# EAGLE board BusPirate-v3a-final (EAGLE 5.06)
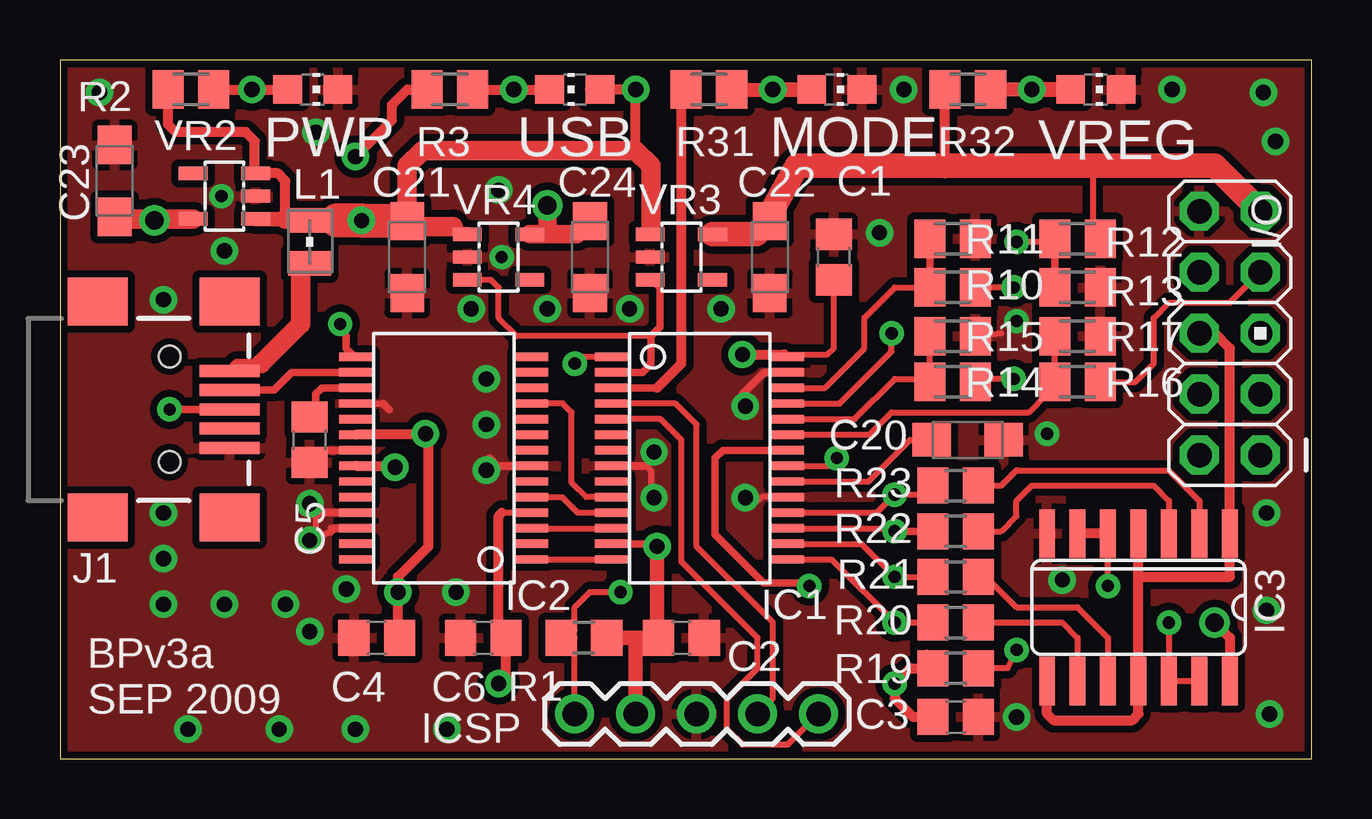
[diagram p0: board, top side]
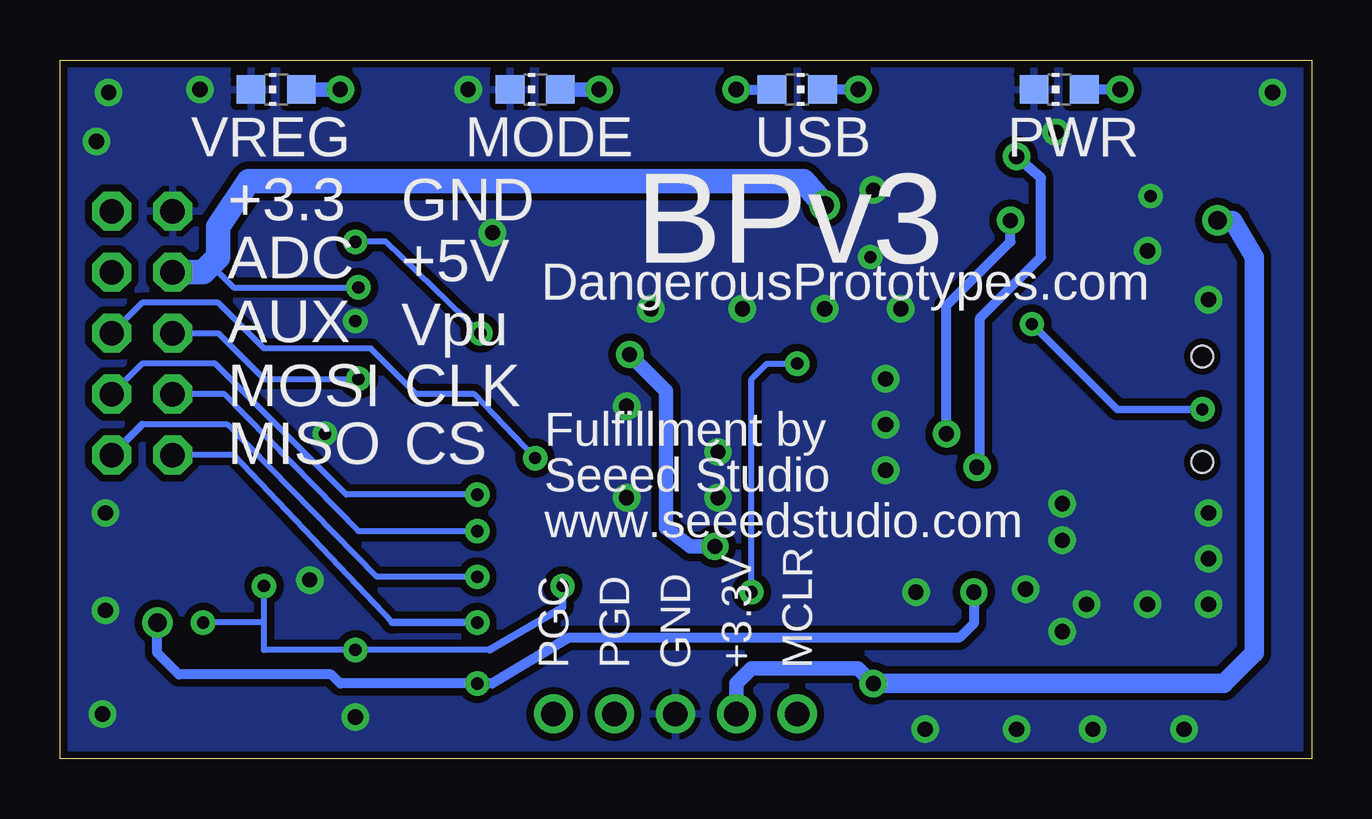
[diagram p1: board, bottom side, seen from below]

Size 52.19 x 29.13 mm. Coordinates in mm from the lower left corner, seen from the top.
Outline: 52.19,0 52.19,29.13 0,29.13 0,0 52.19,0
Copper layers (1*16): Top 0.035mm / dielectric 1.5mm / Bottom 0.035mm
Design rules "SparkFun": minimum track width 8mil, minimum drill 20mil, track to track 8mil, track to pad 8mil, pad to pad 8mil, via to via 8mil, smd to smd 8mil, copper to edge 10mil, drill to drill 8mil, minimum pad ring 12mil, minimum via ring 10mil, stop-mask expansion 4mil, vias tented up to drill 25mil, thermal gap 10mil
tRestrict: area 11.9,9.9 to 12.8,10

## Footprints (pad centres in the part's own frame; a part is rotated, then mirrored left to right if it is on the bottom)
C0805 = smd 1.3 x 1.5: 1 -0.95,0; 2 0.95,0
SMC_A = smd 1.6 x 1.4: + -1.5,0; - 1.5,0
AVR_ICSP = drill 1.016 octagon: 1 -1.27,5.08; 2 1.27,5.08; 3 -1.27,2.54; 4 1.27,2.54; 5 -1.27,0; 6 1.27,0; 7 -1.27,-2.54; 8 1.27,-2.54; 9 -1.27,-5.08; 10 1.27,-5.08
SSOP28DB = smd 0.348 x 1.397: 1 -4.225,-3.656; 2 -3.575,-3.656; 3 -2.925,-3.656; 4 -2.275,-3.656; 5 -1.625,-3.656; 6 -0.975,-3.656; 7 -0.325,-3.656; 8 0.325,-3.656; 9 0.975,-3.656; 10 1.625,-3.656; 11 2.275,-3.656; 12 2.925,-3.656; 13 3.575,-3.656; 14 4.225,-3.656; 15 4.225,3.656; 16 3.575,3.656; 17 2.925,3.656; 18 2.275,3.656; 19 1.625,3.656; 20 0.975,3.656; 21 0.325,3.656; 22 -0.325,3.656; 23 -0.975,3.656; 24 -1.625,3.656; 25 -2.275,3.656; 26 -2.925,3.656; 27 -3.575,3.656; 28 -4.225,3.656
SO14 = smd 0.66 x 2.032: 1 -3.81,-3.073; 2 -2.54,-3.073; 3 -1.27,-3.073; 4 0,-3.073; 5 1.27,-3.073; 6 2.54,-3.073; 7 3.81,-3.073; 8 3.81,3.073; 9 2.54,3.073; 10 1.27,3.073; 11 0,3.073; 12 -1.27,3.073; 13 -2.54,3.073; 14 -3.81,3.073
1X05 = drill 1.016 round: 1 0,0; 2 2.54,0; 3 5.08,0; 4 7.62,0; 5 10.16,0
USB-MINIB = smd 2.5 x 0.5: D+ 2.5,0; D- 2.5,0.8; GND 2.5,-1.6; ID 2.5,-0.8; VBUS 2.5,1.6 | smd 2.5 x 2: GND@1 -3,-4.5; GND@2 -3,4.5; GND@3 2.5,4.5; GND@4 2.5,-4.5 | hole 0.9: 0,2.2; 0,-2.2
WE-KI_0805_B = smd 1.02 x 1.78: 1 -0.89,0; 2 0.89,0
CHIP-LED0805 = smd 1.2 x 1.2: A 0,-1.05; C 0,1.05
R0805 = smd 1.3 x 1.5: 1 -0.95,0; 2 0.95,0
M0805 = smd 1.3 x 1.6: 1 -0.95,0; 2 0.95,0
SOT23-5 = smd 0.55 x 1.2: 1 -0.95,-1.3; 2 0,-1.3; 3 0.95,-1.3; 4 0.95,1.3; 5 -0.95,1.3

## Placement (x,y rotation side)
C1  0.1uF  [C0805]  32.25,20.92 90 top
C2  0.1uF  [C0805]  25.9,5.04 0 top
C3  0.1uf  [C0805]  37.33,1.74 0 top
C4  0.1uF  [C0805]  13.2,5.04 180 top
C5  0.1uF  [C0805]  10.41,13.3 270 top
C6  0.1uF  [C0805]  17.65,5.04 180 top
C20  10uF  [SMC_A]  37.84,13.3 0 top
C21  10uF  [SMC_A]  14.47,20.92 270 top
C22  2.2uF  [SMC_A]  29.59,20.92 270 top
C23  2.2uF  [SMC_A]  2.28,24.09 90 top
C24  2.2uF  [SMC_A]  22.09,20.92 270 top
I/O  M05X2PTH  [AVR_ICSP]  48.76,17.74 180 top
IC1  PIC24FJ64GA002-I/SSSS-ALTERNATE  [SSOP28DB]  26.66,12.54 270 top
IC2  FT232RLSSOP  [SSOP28DB]  16,12.54 90 top
IC3  4066D  [SO14]  44.95,6.31 180 top
ICSP  M05X1PTH  [1X05]  21.46,1.87 0 top
J1  USBSMD  [USB-MINIB]  4.57,14.57 0 top
L1  700mA+ ferrite bead  [WE-KI_0805_B]  10.41,21.55 270 top
LED1  [CHIP-LED0805]  10.54,27.9 270 top
LED1A  [CHIP-LED0805]  10.54,27.9 90 bottom
LED2  [CHIP-LED0805]  32.38,27.9 270 top
LED2A  [CHIP-LED0805]  32.38,27.9 90 bottom
LED3  [CHIP-LED0805]  43.17,27.9 270 top
LED3A  [CHIP-LED0805]  43.17,27.9 90 bottom
LED4  [CHIP-LED0805]  21.46,27.9 90 top
LED4A  [CHIP-LED0805]  21.46,27.9 270 bottom
R1  2K  [R0805]  21.84,5.04 0 top
R2  1K1  [M0805]  5.46,27.9 180 top
R3  1K1  [M0805]  16.25,27.9 180 top
R10  10K  [M0805]  37.21,19.65 180 top
R11  10K  [M0805]  37.21,21.68 180 top
R12  10K  [M0805]  42.41,21.68 180 top
R13  10K  [M0805]  42.41,19.65 180 top
R14  10K  [M0805]  37.21,15.71 180 top
R15  10K  [M0805]  37.21,17.61 180 top
R16  10K  [M0805]  42.41,15.71 180 top
R17  10K  [M0805]  42.41,17.61 180 top
R19  10K  [R0805]  37.33,3.77 0 top
R20  10K  [R0805]  37.33,5.68 0 top
R21  10K  [R0805]  37.33,7.58 0 top
R22  10K  [R0805]  37.33,9.49 0 top
R23  2K  [R0805]  37.33,11.39 0 top
R31  390R  [M0805]  27.05,27.9 180 top
R32  390R  [M0805]  37.84,27.9 180 top
VR2  MIC5205-3.3YM5  [SOT23-5]  6.85,23.46 90 top
VR3  MIC5205-3.3YM5  [SOT23-5]  25.9,20.92 270 top
VR4  MIC5205-5.0YM5  [SOT23-5]  18.28,20.92 270 top

## Library data of the parts
C1-C6 C20-C24 R1 R2 R19-R23 R31 R32 = rcl
I/O IC2 ICSP J1 VR2-VR4 = SparkFun
IC1 = microchip-pic24
IC3 = 40xx
L1 = wuerth-elektronik
LED1 LED1A LED2 LED2A LED3 LED3A LED4 LED4A = led
R3 R10-R17 = resistor

## Nets
$N26: J1.VBUS L1.2
ADC: I/O.7 R16.1
ADC1: IC1.23 R16.2 R17.2
ADC2: IC1.24 R14.2 R15.2
ADC3: IC1.25 R12.2 R13.2
ADC4: IC1.26 R10.2 R11.2
AUX1: I/O.5 IC1.21
CLK: I/O.4 IC1.17 R22.1
CS: I/O.2 IC1.15 R20.1
CTS: IC1.10 IC2.11
GND: C1.2 C2.2 C3.2 C4.2 C5.2 C6.2 C20.- C21.- C22.- C23.- C24.- I/O.10 IC1.8 IC1.19 IC1.27 IC2.7 IC2.18 IC2.21 IC2.25 IC2.26 IC3.7 ICSP.3 J1.GND LED1.C LED1A.C LED2.C LED2A.C LED3.C LED3A.C R11.1 R13.1 R15.1 R17.1 VR2.2 VR3.2 VR4.2
LD1: IC1.3 R31.2
MCLR: IC1.1 ICSP.1 R1.1
MISO: I/O.1 IC1.16 R21.1
MOSI: I/O.3 IC1.18 R23.1
N$1: IC3.2 R23.2
N$2: IC3.3 R22.2
N$3: C20.+ IC1.20
N$4: IC3.10 R21.2
N$5: IC3.9 R20.2
N$6: LED2.A LED2A.A R31.1
N$7: LED1.A LED1A.A R2.1
N$8: VR2.4
N$9: C5.1 IC2.17
N$11: IC2.22 R3.2
N$13: LED4.C LED4A.C R3.1
N$15: IC2.15 J1.D+
N$16: IC2.16 J1.D-
N$18: LED3.A LED3A.A R32.1
PGC: IC1.5 ICSP.5
PGD: IC1.4 ICSP.4
PULLUPEN: IC1.22 IC3.5 IC3.6 IC3.12 IC3.13 R19.2
RTS: IC1.12 IC2.3
RX: IC1.11 IC2.5
SWV33: C22.+ I/O.9 R12.1 R32.2 VR3.5
SWV50: C24.+ I/O.8 R10.1 VR4.5
TP0: IC1.9
TP1: IC1.7
TP2: IC1.6
TX: IC1.14 IC2.1
V+: C3.1 C4.1 C21.+ IC2.20 IC3.14 L1.1 LED4.A LED4A.A R2.2 R19.1 VR2.1 VR2.3 VR3.1 VR4.1
VCC: C1.1 C2.1 C6.1 C23.+ IC1.13 IC1.28 IC2.4 ICSP.2 R1.2 VR2.5
VEXTERN: I/O.6 IC3.1 IC3.4 IC3.8 IC3.11 R14.1
VREGEN: IC1.2 VR3.3 VR4.3

## Tracks (layer width: path | path; a pad name or v marks a point on that pad's centre or on a via)
$N26
  Top 0.406: 8.38,16.47 7.37,16.47 J1.VBUS
  Top 0.813: L1.2 10.03,20.41 10.03,18.12 8.38,16.47
ADC
  Top 0.254: I/O.7 48.76,19.01 46.22,19.01 45.59,18.38 45.59,16.47 44.83,15.71 R16.1
ADC1
  Top 0.254: R17.2 R16.2 41.46,15.2 41.14,15.2 40.38,14.44 34.67,14.44 33.74,13.51 IC1.23
ADC2
  Top 0.254: R15.2 R14.2 36.26,15.84 34.79,15.84 33.12,14.16 IC1.24
ADC3  (via drill 0.51)
  Top 0.254: v34.67,17.74 34.67,16.98 32.5,14.81 IC1.25 | v39.87,21.55 41.34,21.55 R12.2
  Top 0.305: R13.2 R12.2 41.46,21.87
  Bottom 0.254: v39.87,21.55 38.6,21.55 v34.67,17.74
ADC4
  Top 0.254: IC1.26 31.88,15.46 33.52,17.11 33.52,18.38 34.79,19.65 R10.2
  Top 0.305: R10.2 R11.2
  Top 0.406: R10.2 36.06,19.65
AUX1  (via drill 0.51)
  Top 0.254: IC1.21 32.05,12.21 v32.38,12.54
  Bottom 0.254: I/O.5 48.76,19.01 45.59,19.01 43.68,17.11 39.24,17.11 37.33,15.2 34.92,15.2 v32.38,12.54
CLK  (via drill 0.51)
  Top 0.254: IC1.17 34.67,9.61 v34.79,9.49
  Top 0.305: v34.79,9.49 R22.1
  Bottom 0.254: I/O.4 45.33,15.2 39.75,9.49 v34.79,9.49
CS  (via drill 0.51)
  Top 0.254: R20.1 v34.79,5.68 32.25,8.22 | 32.25,8.22 32.22,8.25 | IC1.15 32.16,8.31 32.25,8.22
  Bottom 0.254: I/O.2 44.95,12.66 38.35,5.68
  Bottom 0.305: v34.79,5.68 38.35,5.68
CTS
  Top 0.254: IC1.10 21.94,10.91 21.33,11.52 21.33,14.44 20.95,14.82 19.66,14.82 IC2.11
GND  (via drill 0.51, 0.64)
  Top 0.254: IC2.18 13.47,14.81 | R15.1 39.24,17.74 | 24.45,12.21 24.63,12.03 24.63,11.01 v24.76,10.88 | IC1.19 29.23,10.91 29.08,10.76 | 10.66,10.12 10.66,9.49 | v10.41,9.11 11.3,9.49
  Top 0.305: IC2.7 18.23,12.21 17.9,12.54 | 13.47,14.81 13.71,14.57 | IC1.27 29.35,16.11 28.44,15.2 28.44,14.82 v28.57,14.69 | IC1.8 24.45,12.21 | IC2.21 10.53,12.86 C5.2 | IC2.25 10.8,10.26 10.66,10.12 | IC2.26 11.3,9.61 11.3,9.49
  other vias: 41.78,7.45 50.29,6.18 50.41,1.87 41.14,13.55 39.87,18.25 34.16,21.93 4.31,10.25 4.31,19.14 35.17,27.9 28.57,10.88 39.87,1.74 50.29,10.25 50.67,25.74 23.74,18.76 20.32,18.76 18.28,23.71 17.14,18.76 17.77,15.84 4.31,6.44 12.31,1.23 4.31,8.34 10.41,10.63 24.76,12.79 10.66,26.12 27.55,18.76 18.41,20.92 5.33,1.23 50.16,27.78 46.35,27.9 9.39,6.44 17.77,12.03 17.77,13.93 6.85,6.44 1.65,27.78 16.5,6.95 10.41,5.3 9.14,1.23 16.12,1.23 11.93,7.07 6.73,23.46 6.85,21.17
  pour Top (isolate 0.305): 0.5,29.17 51.94,29.17 51.94,-0.04 0.5,-0.04
  pour Bottom (isolate 0.305): 0.5,29.17 51.94,29.17 51.94,-0.04 0.5,-0.04
LD1
  Top 0.305: IC1.3 24.89,15.46
  Top 0.406: 24.89,15.46 25.9,16.47 25.9,27.58 R31.2
MCLR  (via drill 0.51)
  Top 0.254: IC1.1 21.75,16.76 v21.46,16.47 | v23.36,6.95 22.09,6.95 21.46,6.31 21.46,5.36 R1.1 21.46,5.04 ICSP.1
  Bottom 0.254: v21.46,16.47 22.73,16.47 23.36,15.84 v23.36,6.95
MISO  (via drill 0.51)
  Top 0.254: v34.79,7.58 R21.1 | v34.79,7.58 34.69,7.69 | IC1.16 33.41,8.96 v34.79,7.58
  Bottom 0.254: 48.76,13.93 45.21,13.93 38.98,7.58 v34.79,7.58
  Bottom 0.305: 48.76,13.93 I/O.1
MOSI  (via drill 0.51)
  Top 0.254: IC1.18 34.04,10.26 v34.79,11.01 36,11.01 R23.1
  Bottom 0.254: I/O.3 48.76,16.47 45.72,16.47 40.25,11.01 v34.79,11.01
N$1
  Top 0.254: IC3.2 47.49,10.76 46.22,12.03 39.87,12.03 39.24,11.39 R23.2
N$2
  Top 0.254: R22.2 39.24,9.49 39.87,10.12 39.87,10.76 40.51,11.39 45.59,11.39 46.22,10.76 IC3.3
N$3
  Top 0.254: IC1.20 33.69,11.56 35.43,13.3 C20.+
N$4
  Top 0.254: R21.2 38.6,7.58 39.87,6.31 42.41,6.31 43.68,5.04 IC3.10
N$5
  Top 0.254: R20.2 41.78,5.68 42.41,5.04 IC3.9
N$6  (via drill 0.64)
  Top 0.406: R31.1 28.16,27.87
  Top 0.61: 28.16,27.87 LED2A.A v29.71,27.9
  Bottom 0.61: v29.71,27.9 LED2A.A
N$7  (via drill 0.64)
  Top 0.406: 6.22,27.9 R2.1 v8,27.9 LED1A.A
  Bottom 0.406: v8,27.9 LED1A.A
N$9
  Top 0.305: IC2.17 10.92,15.46 10.66,15.2 10.66,14.5 C5.1
N$11  (via drill 0.64)
  Top 0.406: 15.36,27.78 R3.2 14.47,27.9 13.84,27.27 13.84,26.63 v12.31,25.11 | IC2.22 13.91,12.21 v13.96,12.15
  Bottom 0.406: v12.31,25.11 11.3,24.22 11.3,20.92 13.84,18.38 13.84,12.15 v13.96,12.15
N$13  (via drill 0.64)
  Top 0.406: R3.1 v18.92,27.9 | v18.92,27.9 LED4A.C v18.92,27.9
  Bottom 0.406: v18.92,27.9 LED4A.C
N$15  (via drill 0.51)
  Top 0.305: v4.57,14.57 J1.D+ | IC2.15 12.28,16.76 11.93,17.11 11.93,17.61 v11.68,18.12
  Bottom 0.305: v4.57,14.57 8.12,14.57 v11.68,18.12
N$16
  Top 0.254: IC2.16 12.36,16.09
  Top 0.305: J1.D- 8.92,15.37 9.67,16.11 IC2.16
N$18  (via drill 0.64)
  Top 0.406: 42.1,27.93 LED3A.A
  Top 0.61: R32.1 42.1,27.93 | LED3A.A v40.51,27.9
  Bottom 0.61: v40.51,27.9 LED3A.A
PGC
  Top 0.254: IC1.5 25.04,14.16 25.9,13.3 25.9,8.22 29.08,5.04 29.08,3.77 27.81,2.5 27.81,1.23 28.44,0.6 30.35,0.6 ICSP.5
PGD
  Top 0.254: IC1.4 25.66,14.81 26.54,13.93 26.54,8.85 29.71,5.68 29.71,2.5 ICSP.4
PULLUPEN  (via drill 0.51)
  Top 0.254: v46.22,5.68 IC3.12 IC3.13 | v43.68,7.2 IC3.5 | R19.2 39.49,3.77 v39.87,4.53
  Top 0.305: IC1.22 27.62,12.86 27.3,12.54 27.3,9.36 29.33,7.33 31.11,7.33 v31.24,7.2
  Top 0.406: IC3.5 IC3.6
  Bottom 0.254: 43.68,5.68 43.68,4.53 v39.87,4.53 34.28,4.53 | 43.68,5.68 v43.68,7.2 | 43.68,5.68 v46.22,5.68
  Bottom 0.305: v31.24,7.2 31.24,6.31 34.28,4.53
RTS
  Top 0.254: IC2.3 IC1.12
RX
  Top 0.254: IC1.11 21.57,10.26 20.92,10.91 IC2.5
SWV33
  Top 0.254: R12.1 43.05,21.55 43.05,24.73
  Top 0.406: 37.02,27.9 R32.2 36.89,24.41 36.7,24.73
  Top 0.61: C22.+ 29.59,22.69
  Top 1.016: VR3.5 29.04,21.87 C22.+ | 29.59,22.69 30.73,24.73 36.7,24.73 43.05,24.73 48.13,24.73 I/O.9
SWV50  (via drill 0.51, 0.76)
  Top 0.254: v39.75,19.65 R10.1 | C24.+ 22.09,22.19
  Top 0.61: 21.54,21.87 C24.+ | 20.19,21.87 20.32,21.99
  Top 0.762: VR4.5 20.19,21.87 21.54,21.87 | 20.32,21.99 v20.32,23.08
  Bottom 0.254: v39.75,19.65 44.95,19.65 45.91,20.6
  Bottom 1.016: v20.32,23.08 21.2,24.09 44.32,24.09 45.59,22.19 45.59,20.92 45.91,20.6 46.22,20.28 I/O.8
TX
  Top 0.254: IC2.1 IC1.14
V+  (via drill 0.51, 0.64, 0.76)
  Top 0.254: IC3.14 48.76,2.82 | 36.13,4.34 R19.1 36.38,3.45
  Top 0.406: C4.1 14.09,5.74 14.09,7.58 | 36.13,4.34 36.13,3.84 36.06,3.77 35.43,3.77 v34.79,3.14 34.79,2.5 35.55,1.74 C3.1 | 14.09,7.58 v14.09,6.95 | 14.09,7.58 15.36,8.85 15.36,13.42 v15.23,13.55 | IC3.14 48.76,5.04 v48.13,5.68 | 22.09,27.9 LED4A.A v24,27.9 24,25.36 | 9.39,22.51 9.39,24.09 9.08,24.41 VR2.3 8.12,24.44 8.12,25.74 7.74,26.12 4.82,26.12 4.51,26.44 R2.2 | v15.23,13.55 15.11,13.55 | IC2.20 15.19,13.51 v15.23,13.55
  Top 0.61: 9.39,22.51 VR2.1 | VR4.1 16.7,21.87 16.38,22.19 | VR3.1 24.6,22.16 24.63,22.19
  Top 0.813: 14.47,22.44 14.47,24.73 15.11,25.36 24,25.36 24.63,24.73 24.63,22.19 | 16.38,22.19 14.7,22.19 C21.+ | 9.39,22.51 10.34,22.51 L1.1
  Top 1.016: 14.47,22.44 C21.+ | v12.57,22.44 | L1.1 11.55,22.44
  Top 1.422: 14.47,22.44 v12.57,22.44 11.55,22.44
  Bottom 0.406: v48.13,5.68 48.13,4.41 47.24,3.52 40.89,3.52 40.51,3.14 v34.79,3.14 34.16,3.14 30.98,5.04 14.7,5.04 14.1,5.64 v14.1,6.94 v14.09,6.95 | v24,27.9 LED4A.A | v15.23,13.55 15.23,18.89 12.57,21.55 v12.57,22.44
VCC  (via drill 0.64, 0.76)
  Top 0.254: R1.2 23.36,4.72 | 30.2,16.85 32,16.85 32.25,17.11 C1.1 | 18.42,10.26 IC2.4 | C6.1 18.28,5.36
  Top 0.305: IC1.13 24.78,8.96 v24.89,8.85 | 30.2,16.85 30.23,16.85 IC1.28
  Top 0.406: 25.27,5.36 C2.1 24.89,5.36 | v24.89,8.85 24.52,8.96 | v28.44,16.85 30.2,16.85 | 18.42,10.26 18.28,10.12 18.28,5.36 | C6.1 18.6,3.45 v18.28,3.14
  Top 0.61: 24,5.04 R1.2 | 24,5.04 C2.1 | 24.89,5.36 v24.89,8.85 | ICSP.2 24,5.04
  Top 0.813: C23.+ 2.49,22.51 VR2.5 4.25,22.51 v3.93,22.44
  Bottom 0.61: ICSP.2 24,3.14 23.36,3.77 18.92,3.77 v18.28,3.14 | v24.89,8.85 25.9,8.85 26.92,9.61 26.92,15.33 v28.44,16.85
  Bottom 0.813: v3.93,22.44 3.3,22.44 2.41,20.92 2.41,4.41 3.68,3.14 v18.28,3.14
VEXTERN  (via drill 0.51)
  Top 0.254: v39.75,15.84 38.28,15.84 R14.1
  Top 0.406: 44.95,7.58 48.76,7.58 IC3.1 48.76,17.11 48.13,17.74 I/O.6 | IC3.8 41.14,1.87 41.4,1.61 44.7,1.61 44.95,1.87 IC3.11 44.95,7.58 | 44.95,7.58 IC3.4
  Bottom 0.254: I/O.6 45.59,17.74 43.68,15.84 v39.75,15.84
VREGEN
  Top 0.254: VR4.3 17.96,19.97 18.28,19.65 18.28,18.38 19.05,17.61 24.63,17.61
  Top 0.305: VR3.3 24.63,19.94 24.72,19.94 25.01,19.65 25.01,18 24.63,17.61 24.63,16.47 24.27,16.11 IC1.2

## Text on the board
tNames: PWR | USB | MODE | VREG | BPv3a | SEP 2009
bNames: PWR | USB | MODE | VREG | GND | +3.3 | BPv3 | +5V | ADC | DangerousPrototypes.com | Vpu | AUX | CLK | MOSI | Fulfillment by | CS | MISO | Seeed Studio | www.seeedstudio.com | MCLR | +3.3V | GND | PGD | PGC
Reference: GND | +3v | +5v | ADC | Vpu | AUX1 | CLK | MOSI | USB | CS | MISO | I/O header | MCLR | +3.3V | GND | DATA | CLOCK | Programming Header